# Altium PCB Fingerprint_Mechanism_PCB_V0.4.PcbDoc
Units mil, origin at the board's own origin, x right, y up, seen from the top; angles counter-clockwise.
Board outline 1500 x 4000 mil, 2 copper layers (Top Layer, Bottom Layer); 7 components, 20 nets, 77 pads, 6 vias.
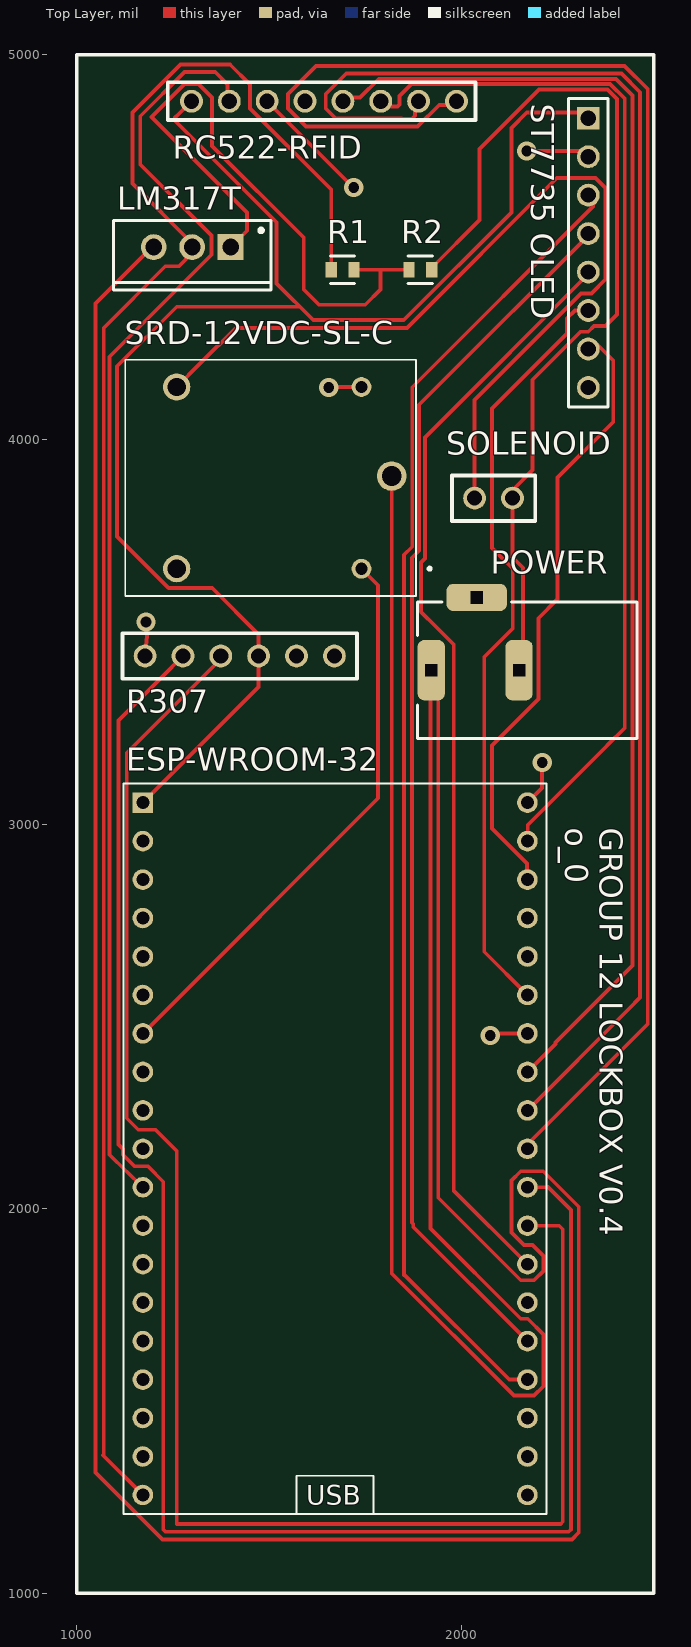
[diagram p0: Top Layer view]
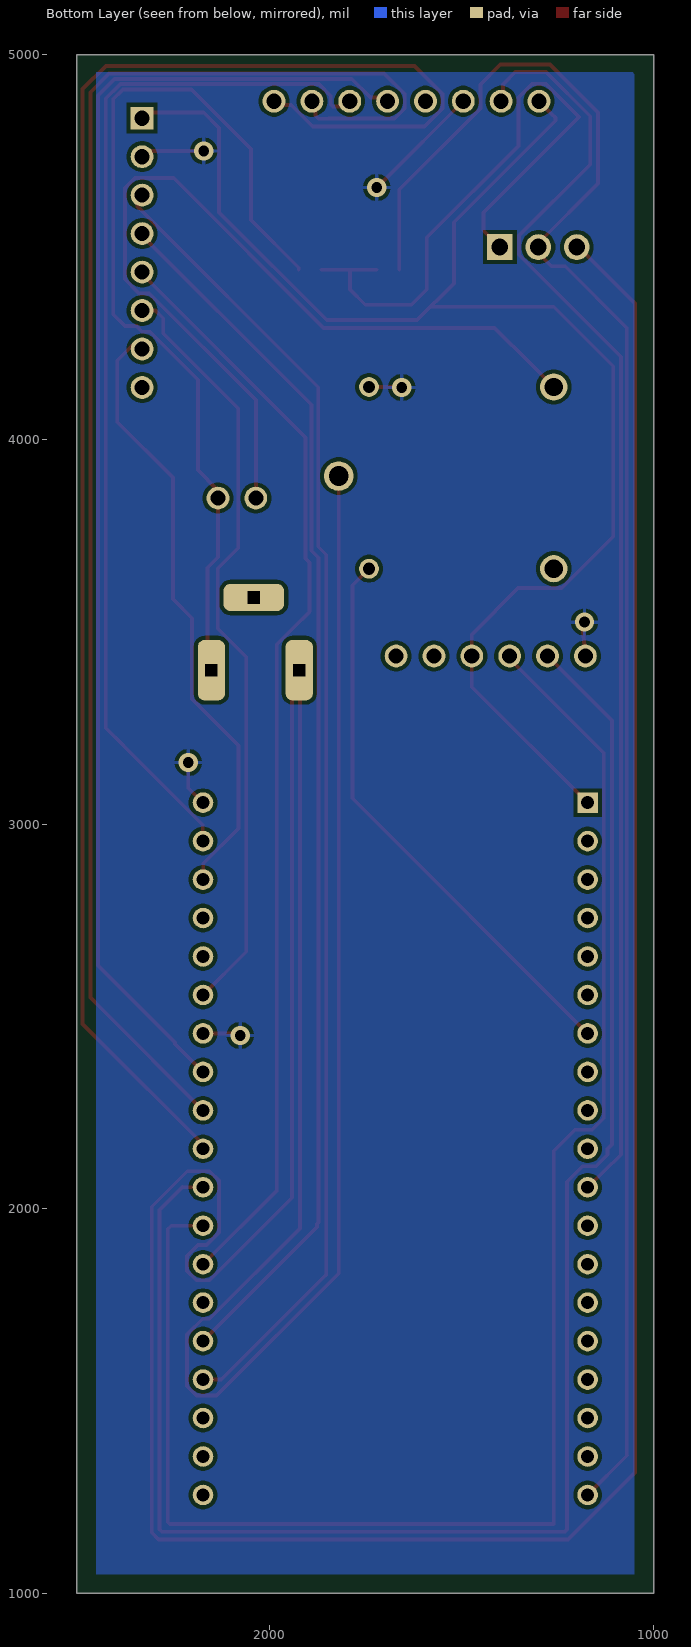
[diagram p1: Bottom Layer view, seen from below]

## Layer stack, top to bottom
Top Solder: solder mask 0.4, Solder Resist, Dk 3.5
Top Layer: signal copper 1.4
Dielectric 1: dielectric 12.6, FR-4, Dk 4.8
Bottom Layer: signal copper 1.4
Bottom Solder: solder mask 0.4, Solder Resist, Dk 3.5

## Board outline
1000,1000 1000,5000 2500,5000 2500,1000

## Design rules (kind name [scope] priority, off if disabled: settings)
Clearance [All] p1: gap=10 ignorepadtopadclearanceinfootprint=FALSE
PolygonConnect [All] p1: connectstyle=Relief reliefconductorwidth=10 reliefentries=4 polygonreliefangle="90 Angle" airgapwidth=10
RoutingVias [All] p1: holewidth=28 width=50 viastyle="Through Hole" minholewidth=28 minwidth=50 maxholewidth=28 maxwidth=50
SolderMaskExpansion [All] p1: expansion=4 istentingtop=FALSE
SupplyNets "Schematic Supply Nets_1" [InNet('GND')] p1: voltage=0.000
SupplyNets "Schematic Supply Nets" [InNet('24V VCC')] p2: voltage=0.000
Width [All] p1: maxlimit=10 minlimit=10 preferedwidth=10
30 further rules are at their usual default settings.

## Components (designator, comment, footprint, x,y, rotation, side; value= is the part's Value field where it differs from the comment)
ESP-WROOM-32 "Comment" ESP32-DEVKITC 1671.75,2155.5 r0 top
LM317T "LM317T Voltage Regulator (5V)" TO-220 1300,4500 r180 top (schematic designator C5)
POWER "Comment" 694108301002 2171.65,3400 r90 top
R1 "Comment" FP-CRCW0603-e3-MFG 1691.19,4441.17 r0 top
R2 "Comment" FP-CRCW0603-e3-MFG 1893.32,4441.17 r0 top
SRD-12VDC-SL-C "Comment" RELAY_SRD-12VDC-SL-C 1500,3900 r180 top
"ST7735 OLED" "Comment" RFID-RC522 2330,4485 r270 top

## Footprints (in the part's own frame and the unit in brackets; to place one, negate y for a bottom-side part, rotate by r counter-clockwise, add the part's x,y. Pads: shape width x height; smd on the part's side, far side on the other; paste and mask are expansions set on the pad)
694108301002 [mm] "DC Power Jack Right Angled(6.4)"
  rrect50% 4x1.8 hole 0.8 square: 1(0,6.35) 2(0,0.55)
  rrect50% 1.8x4 hole 0.8 square: 3(4.8,3.35)
  silkscreen extent -4.5,-7.25 4.5,7.25, body extent -4.5,-7.25 5,7.25, height 10.75
ESP32-DEVKITC [mm]
  rect 1.358x1.358 / inner round 1.358 / far side rect 1.358x1.358 hole 0.85: 1(-12.7,22.86)
  round 1.358 hole 0.85: 2(-12.7,20.32) 3(-12.7,17.78) 4(-12.7,15.24) 5(-12.7,12.7) 6(-12.7,10.16) 7(-12.7,7.62) 8(-12.7,5.08) 9(-12.7,2.54) 10(-12.7,0) 11(-12.7,-2.54) 12(-12.7,-5.08) 13(-12.7,-7.62) 14(-12.7,-10.16) 15(-12.7,-12.7) 16(-12.7,-15.24) 17(-12.7,-17.78) 18(-12.7,-20.32) 19(-12.7,-22.86) 20(12.7,-22.86) 21(12.7,-20.32) 22(12.7,-17.78) 23(12.7,-15.24) 24(12.7,-12.7) 25(12.7,-10.16) 26(12.7,-7.62) 27(12.7,-5.08) 28(12.7,-2.54) 29(12.7,0) 30(12.7,2.54) 31(12.7,5.08) 32(12.7,7.62) 33(12.7,10.16) 34(12.7,12.7) 35(12.7,15.24) 36(12.7,17.78) 37(12.7,20.32) 38(12.7,22.86)
  silkscreen extent -13.97,-24.13 13.97,24.13
FP-CRCW0603-e3-MFG [mm]
  rect 0.75x1 smd paste+0 mask+0: 1(-0.75,0) 2(0.75,0)
  silkscreen extent -0.8,-0.9 0.8,0.9, body extent -1.22,-0.6 1.22,0.6, height 0.25
RELAY_SRD-12VDC-SL-C [mm]
  round 1.308 hole 0.8: COIL1(-6.1,6) COIL2(-6.1,-6)
  round 1.95 hole 1.3: COM(-8.1,-0.12)
  round 1.8 hole 1.2: NC(6.1,6) NO(6.1,-6)
  silkscreen extent -10.7,-7.8 9.5,7.8
RFID-RC522 [mm]
  rect 1.508x1.508 / inner round 1.508 / far side rect 1.508x1.508 hole 1: 1(-8.89,0)
  round 1.508 hole 1: 2(-6.35,0) 3(-3.81,0) 4(-1.27,0) 5(1.27,0) 6(3.81,0) 7(6.35,0) 8(8.89,0)
  silkscreen extent -10.19,-1.3 10.19,1.3
TO-220 [mm] "TO, Thru-Hole, Vertical, Heatsink Mounted; 3 In-Line Leads; Pitch 2.54 mm"
  rect 1.7x1.7 hole 1.1: 1(-2.54,0)
  round 1.7 hole 1.1: 2(0,0) 3(2.54,0)
  silkscreen extent -5.2,-1.75 5.2,2.85, body extent -5.25,-1.8 5.25,2.9, height 19.7

## Part data
LM317T: library part CMP-0244-00444-1, "1.5A, 1.2V to 37V Adjustable Voltage Regulator, 3-Pin TO-220", ComponentLink1Description="Manufacturer URL", ComponentLink1URL=http://www.st.com, ComponentLink2Description=Datasheet, ComponentLink2URL=http://www.st.com/internet/com/TECHNICAL_RESOURCES/TECHNICAL_LITERATURE/DATASHEET/CD00000455.pdf, ComponentLink3Description="Package Specification", ComponentLink3URL=http://www.st.com/internet/com/TECHNICAL_RESOURCES/TECHNICAL_LITERATURE/PACKAGE_INFORMATION/CD00004649.pdf, DatasheetVersion=1/11/2011, PackageDescription="TO, Thru-Hole, Vertical, Heatsink Mounted; 3 In-Line Leads; Pitch 2.54 mm", PackageReference=TO-220, PackageVersion=2011

## Free pads (board coordinates)
  round 59.37 hole 39.37: ""(1177.59,3436.77) ""(1276.02,3436.77) ""(1298.19,4879.18) ""(1374.44,3436.77) ""(1396.62,4879.18) ""(1472.87,3436.77) ""(1495.04,4879.18) ""(1571.29,3436.77) ""(1593.47,4879.18) ""(1669.72,3436.77) ""(1691.89,4879.18) ""(1790.32,4879.18) ""(1888.74,4879.18) ""(1987.17,4879.18) ""(2034.45,3847.24) ""(2132.87,3847.24)

## Via types
v1: diameter 50, hole 28, Top Layer to Bottom Layer, 6 vias

## Nets (pads, with @x,y where several pads share a name; then routed paths per layer and width w, separated by ;. In a path a pad name is that pad's centre, name@x,y a point inside that pad or via, vN(x,y) a via of type N, cw(c..) or ccw(c..) an arc to the next point about the centre after c; other vN are vias at no path point)
"24V VCC": 
GND:  | length 78.6
  Top Layer w10: 1177.59,3436.77 v1@1185,3515
  other v1: 2075,2450 2210,3160 1180,3525 1655,4135 1720,4655 2170,4750
NetC0_2: 
NetC0_13: 
NetC0_23: 
NetC0_24: 
NetC0_26: 
NetC0_29: 
NetC0_30: 
NetC0_31: 
NetC0_33: 
NetC0_34: 
NetC0_35: 
NetC0_37: 
NetC2_3: LM317T.2 | length 799.9
  Top Layer w10: 1250,4450 1265.4,4450 1300,4484.6 LM317T.2 1300,4510 1145,4665 1145,4850 1270,4975 1399.14,4975
NetC4_1: 
NetC4_2: 
NetC4_3: 
NetC5_1: LM317T.1 | length 1546.6
  Top Layer w10: 1194.37,4838.55 1442.61,4590.32 1442.61,4542.61 LM317T.1 ; 1195.41,4839.59 1279.68,4923.87 1316.7,4923.87 1351.93,4888.64 1351.93,4763.07 1590,4525 1590,4390 1630,4350 1750,4350 1790,4390 1790,4441.17
NetC5_3: LM317T.3 | length 68.6
  Top Layer w10: 1150,4455 1195,4500 LM317T.3
pads on no net: "ST7735 OLED.1" "ST7735 OLED.2" "ST7735 OLED.3" "ST7735 OLED.4" "ST7735 OLED.5" "ST7735 OLED.6" "ST7735 OLED.7" "ST7735 OLED.8" ESP-WROOM-32.1 ESP-WROOM-32.2 ESP-WROOM-32.3 ESP-WROOM-32.4 ESP-WROOM-32.5 ESP-WROOM-32.6 ESP-WROOM-32.7 ESP-WROOM-32.8 ESP-WROOM-32.9 ESP-WROOM-32.10 ESP-WROOM-32.11 ESP-WROOM-32.12 ESP-WROOM-32.13 ESP-WROOM-32.14 ESP-WROOM-32.15 ESP-WROOM-32.16 ESP-WROOM-32.17 ESP-WROOM-32.18 ESP-WROOM-32.19 ESP-WROOM-32.20 ESP-WROOM-32.21 ESP-WROOM-32.22 ESP-WROOM-32.23 ESP-WROOM-32.24 ESP-WROOM-32.25 ESP-WROOM-32.26 ESP-WROOM-32.27 ESP-WROOM-32.28 ESP-WROOM-32.29 ESP-WROOM-32.30 ESP-WROOM-32.31 ESP-WROOM-32.32 ESP-WROOM-32.33 ESP-WROOM-32.34 ESP-WROOM-32.35 ESP-WROOM-32.36 ESP-WROOM-32.37 ESP-WROOM-32.38 POWER.1 POWER.2 POWER.3 R1.1 R1.2 R2.1 R2.2 SRD-12VDC-SL-C.COIL1 SRD-12VDC-SL-C.COIL2 SRD-12VDC-SL-C.COM SRD-12VDC-SL-C.NC SRD-12VDC-SL-C.NO
copper on no net: | length 66990.9
  Top Layer w10: 1068.63,1358.63 1171.75,1255.5 ; 1070,1360 1070,4290 1230,4450 1255.2,4450 ; 1150,4455 1048.63,4353.63 1048.63,1313.95 1222.57,1140 2287.43,1140 2305,1157.57 2305,2005 2212.76,2097.24 2154.46,2097.24 2130,2072.77 2130,1938.24 2162.73,1905.5 2184.5,1905.5 2213.48,1876.52 2213.48,1838.22 2189.04,1813.77 2154.46,1813.77 1940,2028.24 1940,3381.65 1921.65,3400 ; 1171.75,2055.5 1085,2140 1085,4215 1350,4480 1350,4530 1165,4715 1165,4785 1165,4840 1280,4955 1360,4955 1391.89,4923.11 1391.89,4874.46 ; 1171.75,2455.5 1783.11,3066.87 1783.11,3620.82 1740.16,3663.78 ; 1171.75,3055.5 1472.89,3356.64 1472.89,3436.75 1472.89,3492.87 ; 1177.59,3436.77 1183.02,3442.2 ; 1259.84,4136.22 1319.31,4195.69 1413.62,4290 1858.28,4290 2247.97,4679.68 2348.6,4679.68 2374.68,4653.6 2374.68,4416.49 2337.88,4379.69 2311.4,4379.69 2034.45,4102.73 2034.45,3847.24 ; 1276.02,3436.77 1246.64,3407.39 ; 1298.19,4879.18 1288.75,4869.74 1266.6,4847.59 1255.68,4836.67 1255.68,4828.39 1519.53,4564.53 1519.53,4405.47 1615,4310 1850,4310 2130,4590 2130,4810 2170,4850 2350,4850 ; 1378.11,3433.11 1130.02,3185.02 1130.02,2234.98 1160,2205 1205,2205 1260,2150 1260,1180 2257.77,1180 2263.63,1185.86 2263.63,1946.37 2254.5,1955.5 2171.75,1955.5 ; 1387.17,4869.74 1396.62,4879.18 ; 1399.14,4974.14 1450.36,4922.93 1450.36,4860.68 1661.67,4649.37 1661.67,4441.17 ; 1472.87,3436.77 1472.87,3492.87 1352.39,3613.35 1238.95,3613.35 1105,3747.3 1105,4190 1260,4345 1580,4345 ; 1495.04,4879.18 1702.11,4672.11 ; 1670,4136.22 1740.16,4136.22 ; 1691.89,4879.18 1701.34,4888.63 1736.57,4888.63 1785.03,4937.09 2401.78,4937.09 2444.69,4894.18 2444.68,2632.19 2414.69,2602.19 2244.37,2431.88 2244.37,2428.12 2171.75,2355.5 ; 1720.72,4441.17 1756.49,4441.17 1828.02,4441.17 1863.79,4441.17 ; 1781.81,4856.38 1790.63,4865.2 1802.51,4865.2 1807.05,4869.74 1813.12,4869.74 1817.66,4865.2 1833.67,4865.2 1839.53,4871.06 1839.53,4893.17 1870.23,4923.87 2386.71,4923.87 2424.69,4885.9 2424.68,3249.68 2380,3205 ; 1818.9,3904.72 1818.9,1831.54 2136.67,1513.77 2189.04,1513.77 2213.48,1538.22 2213.48,1672.79 2172.5,1713.77 2154.46,1713.77 1920,1948.24 1920,3400 ; 1851.22,1827.5 1851.22,3699.93 1872.28,3720.99 1872.28,4135.48 2342.12,4605.31 2342.12,4642.12 2350,4650 ; 1852.5,1827.5 2124.5,1555.5 2171.75,1555.5 ; 1888.74,4879.18 1879.3,4869.74 1879.3,4841.45 1871.42,4833.58 1843.14,4833.58 1844.06,4834.5 1673.38,4834.5 1647.21,4860.68 1647.21,4897.69 1700.75,4951.23 2415.92,4951.23 2464.68,4902.47 2464.69,2548.44 2434.69,2518.44 2171.75,2255.5 ; 1980,2045 1980,3466.66 1935,3511.66 1895,3551.66 1895,3680 1905,3690 1905,4005 2350,4450 ; 1981.13,2046.13 2171.75,1855.5 ; 1987.17,4879.18 1977.72,4869.74 1942.49,4869.74 1886.33,4813.58 1595.88,4813.58 1548.78,4860.68 1548.78,4897.69 1622.32,4971.23 2424.2,4971.23 2484.68,4910.75 2484.68,2480.2 2454.74,2450.26 2171.75,2167.26 2171.75,2155.5 ; 2095,2455.5 2171.75,2455.5 ; 2132.87,3847.24 2132.87,3693.39 2160,3666.26 2160,3413.38 ; 2135,3870 2185,3920 2185,4155 2310,4280 2330,4280 2345,4295 2375,4295 2405,4325 2405,4885 2380,4910 2201.72,4910 2047.16,4755.45 2047.16,4570.41 1922.85,4446.09 ; 2171.75,1655.5 1875,1952.25 1875,1959.91 1871.22,1963.69 1871.22,3691.64 1872.28,3692.71 1890,3710.42 1890,4090 1915,4115 2350,4550 ; 2171.75,2055.5 2224.67,2055.5 2225.44,2056.27 2285,1996.71 2285,1165.86 2279.14,1160 1230.86,1160 1225,1165.86 1225,2070 1185,2110 1155,2110 1150,2110 1120,2140 1120,2155 1108.75,2166.25 1108.75,3269.5 1246.27,3407.02 ; 2171.75,2555.5 2059.5,2667.76 2059.5,3434.51 2133.5,3508.51 2133.5,3664.48 2080,3717.98 2080,3808.48 2080,3989.49 2080,4080 2275,4275 2275,4315 2295,4335 2315,4335 2321.64,4335 2336.64,4350 2350,4350 2340.55,4340.55 ; 2171.75,2855.5 2171,2856.25 2171,2897.24 2079.5,2988.74 2079.5,3204.49 2200.43,3325.42 2200.43,3534.98 2250,3584.54 2250,3900.49 2394.69,4045.18 2394.69,4205.31 2350,4250 2348.83,4251.17 ; 2171.75,2955.5 2172.5,2956.25 2172.5,2997.24 2394.69,3219.42 ; 2171.75,3055.5 2210,3093.75 2210,3135 ; 2195,4750 2350,4750 ; 1246.27,3407.02 1246.64,3407.39 ; 1246.27,3407.02 1246.64,3406.64 1246.64,3407.39 ; 1922.85,4446.09 1922.85,4441.17 1922.85,4446.09

## Polygon pours and split planes (outlines as drawn)
GND on Bottom Layer "GND" (solid, pour order 0): 1050,4950 1055,4955 2450,4955 2450,1050 1050,1050

## Silkscreen, mask and mechanical layers (free items; w line width, h text height)
Top Overlay:
  lines w10: 1000,1000 1000,5000 2500,5000 2500,1000 1000,1000 ; 1118.54,3377.72 1728.77,3377.72 1728.77,3495.83 1118.54,3495.83 1118.54,3377.72 ; 1236.42,4829.97 2036.38,4829.97 2036.38,4928.4 1236.42,4928.4 1236.42,4829.97 ; 1975.39,3788.19 2191.93,3788.19 2191.93,3906.3 1975.39,3906.3 1975.39,3788.19
  text "R307" at 499.67,8046.17 h60
  text "R307" at 699.67,8046.17 h60
  text "R307" at 949.67,8046.17 h60
  text "RC522-RFID" at 1250.15,4729.63 h60
  text "SOLENOID" at 1960,3960 h60
  text "R307" at 1128.54,3289.29 h60
  text "o_0" at 2270,2990 h60 r270
  text "GROUP 12 LOCKBOX V0.4" at 2360,2990 h60 r270

## Text inside footprints (layer, text, board x,y; h text height)
ESP-WROOM-32: Top Overlay "USB" at 1596.75,1230.5 h50